# EAGLE board Numitron3 (EAGLE 9.3.2)
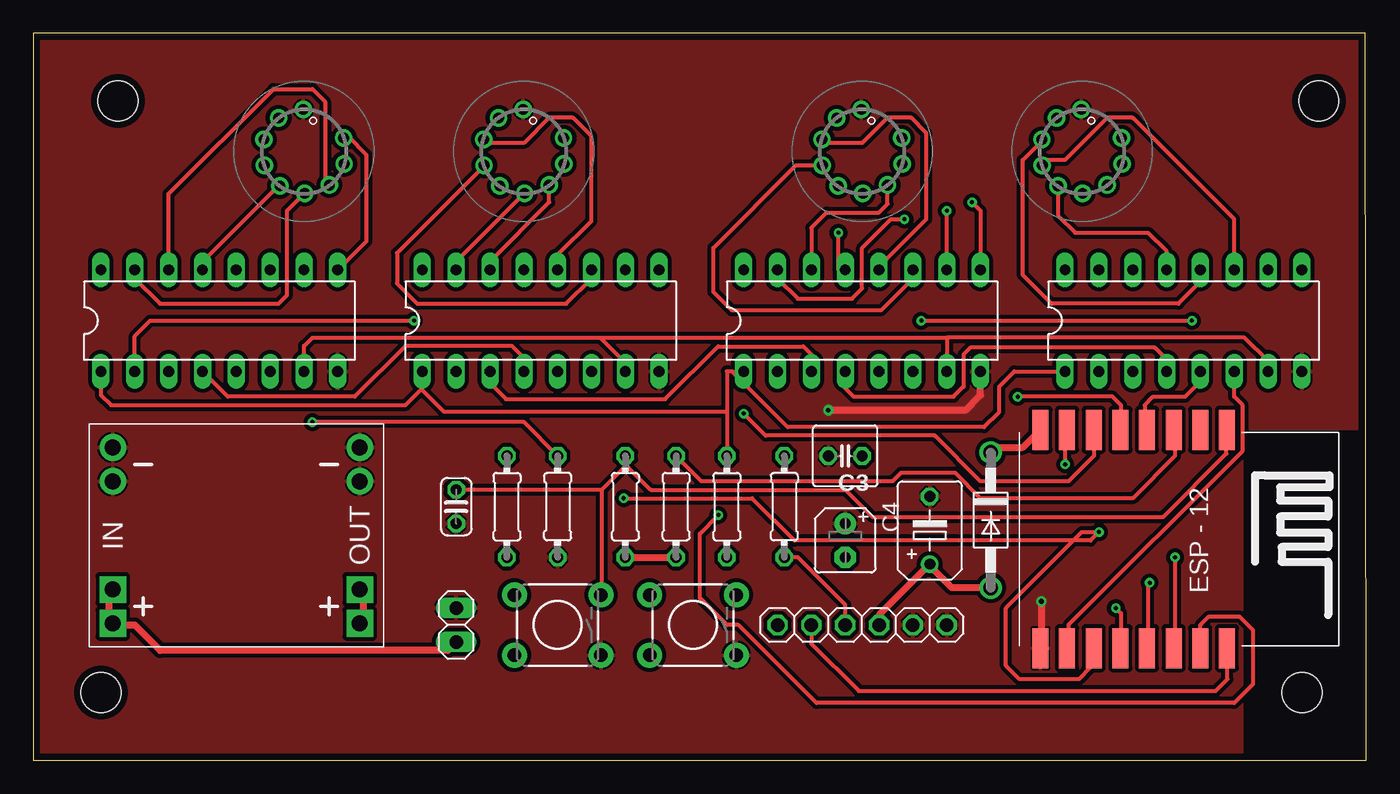
[diagram p0: board, top side]
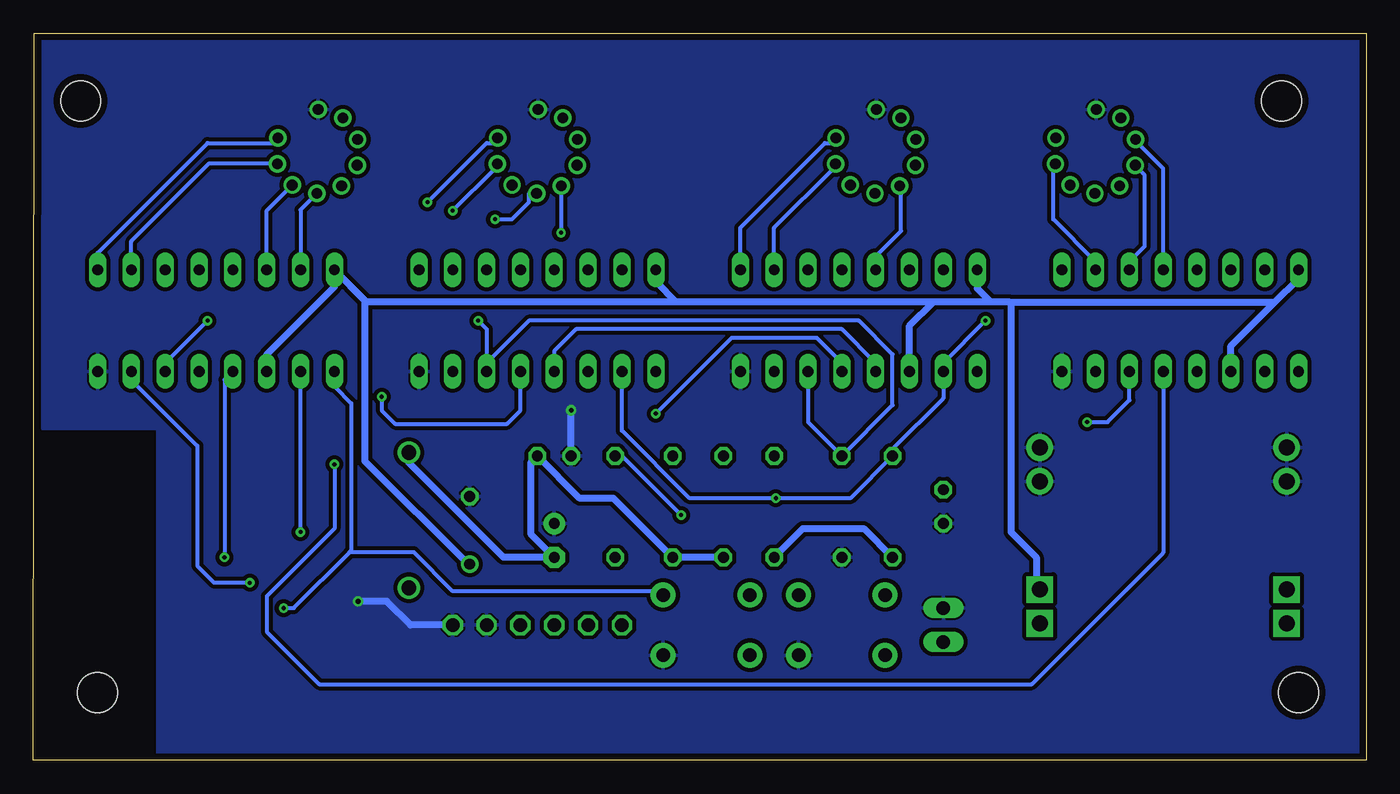
[diagram p1: board, bottom side, seen from below]

Size 100.08 x 54.6 mm. Coordinates in mm from the lower left corner, seen from the top.
Outline: 0,0 100.08,0 100,54.6 0,54.6 0,0
Copper layers (1*16): Top 0.035mm / dielectric 1.5mm / Bottom 0.035mm
Design rules "NYAKARUHAZ_StandardNYAK *": minimum track width 12mil, minimum drill 12mil, track to track 12mil, track to pad 12mil, pad to pad 10mil, via to via 10mil, smd to smd 6mil, copper to edge 20mil, drill to drill 8mil, minimum pad ring 10mil, minimum via ring 8mil, stop-mask expansion 4mil, vias tented up to drill 0mil, thermal gap 6mil
Net classes: 1 power: width 0.508 mm, clearance 0.305 mm
Holes 3 mm at 6.35,49.53 96.52,49.53 95.25,5.08 5.08,5.08

## Footprints (pad centres in the part's own frame; a part is rotated, then mirrored left to right if it is on the bottom)
C025-024X044 = drill 0.813 octagon: 1 -1.27,0; 2 1.27,0
B45181B = drill 0.813: + -2.54,0 | drill 0.813 octagon: - 2.54,0
C025-050X050 = drill 0.813 octagon: 1 -1.27,0; 2 1.27,0
B45181A = drill 0.813 pad 1.6: + -1.27,0 | drill 0.813 pad 1.6 octagon: - 1.27,0
DO41-10 = drill 1.118: A 5.08,0; C -5.08,0
ESP12-SMD = smd 3 x 1.2: ADC -8.3,3.8; CH_PD -8.3,1.8; GND 8.1,-8.2; GPIO0 8.1,-2.2; GPIO2 8.1,-4.2; GPIO4 8.1,1.8; GPIO5 8.1,-0.2; GPIO12 -8.3,-4.2; GPIO13 -8.3,-6.2; GPIO14 -8.3,-2.2; GPIO15 8.1,-6.2; GPIO16 -8.3,-0.2; RESET -8.3,5.8; RXD0 8.1,3.8; TXD0 8.1,5.8; VCC -8.3,-8.2
1X06 = drill 1.016 octagon: 1 -6.35,0; 2 -3.81,0; 3 -1.27,0; 4 1.27,0; 5 3.81,0; 6 6.35,0
DIL16 = drill 0.813 long: 1 -8.89,-3.81; 2 -6.35,-3.81; 3 -3.81,-3.81; 4 -1.27,-3.81; 5 1.27,-3.81; 6 3.81,-3.81; 7 6.35,-3.81; 8 8.89,-3.81; 9 8.89,3.81; 10 6.35,3.81; 11 3.81,3.81; 12 1.27,3.81; 13 -1.27,3.81; 14 -3.81,3.81; 15 -6.35,3.81; 16 -8.89,3.81
1X02 = drill 1.016 long: 1 -1.27,0; 2 1.27,0
TACTILE_SWITCH_PTH_6.0MM = drill 1.016 pad 1.88: 1 -3.251,2.261; 2 3.251,2.261; 3 -3.251,-2.261; 4 3.251,-2.261
0204/7 = drill 0.813 octagon: 1 -3.81,0; 2 3.81,0
IV-9 = drill 0.8: 1 1.854,-2.552; 2 3,-0.975; 3 3,0.975; 4 1.854,2.552; 5 0,3.154; 6 -1.854,2.552; 7 -3,0.975; 8 -3,-0.975; 9 -1.854,-2.552
DC-DC-STEP-DOWN-MP1584 = drill 1.2 pad 2 square: IN+.1 -9.271,-4.064; IN+.2 -9.271,-6.604; OUT+.1 9.271,-4.064; OUT+.2 9.271,-6.604 | drill 1.2 pad 2: IN-.1 -9.271,6.604; IN-.2 -9.271,4.064; OUT-.1 9.271,6.604; OUT-.2 9.271,4.064

## Placement (x,y rotation side)
C1  100n  [C025-024X044]  31.75,19.05 270 top
C2  470u  [B45181B]  67.31,17.27 90 top
C3  100n  [C025-050X050]  60.96,22.86 180 top
C4  10u  [B45181A]  60.96,16.51 270 top
D1  1N4004  [DO41-10]  71.88,18.03 270 top
ESP-07  [ESP12-SMD]  83.82,16.51 270 top
FTDI  [1X06]  62.23,10.16 180 top
IC1  4511N  [DIL16]  13.97,33.02 0 top
IC2  4511N  [DIL16]  38.1,33.02 0 top
IC3  4511N  [DIL16]  62.23,33.02 0 top
IC4  4511N  [DIL16]  86.36,33.02 0 top
JP3  [1X02]  31.75,10.16 270 top
PROG  MOMENTARY-SWITCH-SPST-PTH-6.0MM  [TACTILE_SWITCH_PTH_6.0MM]  49.53,10.16 180 top
R1  10k  [0204/7]  44.45,19.05 270 top
R2  10k  [0204/7]  48.26,19.05 270 top
R4  1k  [0204/7]  56.39,19.05 90 top
R5  10k  [0204/7]  52.07,19.05 270 top
R6  10k  [0204/7]  39.37,19.05 90 top
R7  10k  [0204/7]  35.56,19.05 270 top
RESET  MOMENTARY-SWITCH-SPST-PTH-6.0MM  [TACTILE_SWITCH_PTH_6.0MM]  39.37,10.16 180 top
U$2  IV-9  [IV-9]  20.32,45.72 145 top
U$3  IV-9  [IV-9]  36.83,45.72 145 top
U$4  IV-9  [IV-9]  62.23,45.72 145 top
U$5  IV-9  [IV-9]  78.74,45.72 145 top
U$6  DC-DC-STEP-DOWN-MP1584  [DC-DC-STEP-DOWN-MP1584]  15.24,16.89 0 top

## Library data of the parts
C1-C4 = rcl; SPICEPREFIX: C
D1 = diode
ESP-07 = esp8266modules
FTDI = adafruit
IC1-IC4 = 45xx
JP3 = pinhead
PROG RESET = SparkFun-Switches; PROD_ID: SWCH-08441; SF_SKU: COM-00097
R1 R2 R4-R7 = rcl; SPICEPREFIX: R
U$2-U$5 = domestichacks
U$6 = diy-modules

## Nets
BI: ESP-07.GPIO4 IC1.4 IC2.4 IC3.4 IC4.4
GND [power]: C1.2 C2.- C3.2 C4.+ ESP-07.GND FTDI.1 FTDI.2 IC1.8 IC2.8 IC3.8 IC4.8 JP3.1 PROG.1 R6.1 RESET.1 U$2.1 U$3.1 U$4.1 U$5.1 U$6.IN-.1 U$6.IN-.2 U$6.OUT-.1 U$6.OUT-.2
LE1: ESP-07.GPIO13 IC1.5
LE2: ESP-07.GPIO12 IC2.5
LE3: ESP-07.GPIO14 IC3.5
LE4: ESP-07.GPIO16 IC4.5
N$1: ESP-07.GPIO5 IC1.7 IC2.7 IC3.7 IC4.7
N$2: ESP-07.GPIO0 IC1.1 IC2.1 IC3.1 IC4.1 PROG.3 R5.1
N$3: ESP-07.GPIO2 IC1.2 IC2.2 IC3.2 IC4.2 R7.1
N$4: ESP-07.GPIO15 IC1.6 IC2.6 IC3.6 IC4.6 R6.2
N$5: IC1.13 U$2.5
N$6: IC1.12 U$2.3
N$7: IC1.11 U$2.4
N$8: IC1.10 U$2.8
N$9: IC1.9 U$2.9
N$10: IC1.15 U$2.6
N$11: IC1.14 U$2.7
N$12: IC2.14 U$3.7
N$13: IC2.12 U$3.3
N$14: IC2.13 U$3.5
N$15: IC2.10 U$3.8
N$16: IC2.9 U$3.9
N$17: IC2.11 U$3.4
N$18: IC2.15 U$3.6
N$19: IC3.9 U$4.9
N$20: IC3.13 U$4.5
N$21: IC3.12 U$4.3
N$22: IC3.15 U$4.6
N$23: IC3.14 U$4.7
N$24: IC3.10 U$4.8
N$25: IC3.11 U$4.4
N$26: IC4.14 U$5.7
N$27: IC4.15 U$5.6
N$28: IC4.9 U$5.9
N$29: IC4.10 U$5.8
N$30: IC4.11 U$5.4
N$31: IC4.12 U$5.3
N$32: IC4.13 U$5.5
N$33: ESP-07.CH_PD R2.1
N$37 [power]: JP3.2 U$6.IN+.1 U$6.IN+.2
N$39: FTDI.4 R4.1
RESET: C1.1 ESP-07.RESET R1.1 RESET.3
RX: ESP-07.RXD0 R4.2
TX: ESP-07.TXD0 FTDI.5
VCC [power]: C2.+ D1.A FTDI.3 IC1.3 IC1.16 IC2.3 IC2.16 IC3.3 IC3.16 IC4.3 IC4.16 U$6.OUT+.1 U$6.OUT+.2
VCC_ESP [power]: C3.1 C4.- D1.C ESP-07.VCC R1.2 R2.2 R5.2 R7.2

## Tracks (layer width: path | path; a pad name or v marks a point on that pad's centre or on a via)
BI  (via drill 0.3)
  Top 0.305: v85.72,15.24 85.72,8.89 ESP-07.GPIO4 | IC1.4 14.61,27.3 24.13,27.3 27.94,31.11 35.94,31.11 36.83,30.23 IC2.4 | IC4.4 85.09,30.1 84.2,30.99 70.36,30.99 69.85,30.48 69.85,28.07 69.09,27.3 61.59,27.3 60.96,27.94 IC3.4
  Bottom 0.305: v85.72,15.24 85.72,28.57 IC4.4 | IC2.4 36.83,29.84 39.37,32.38 59.31,32.38 60.96,30.73 IC3.4
GND  (via drill 0.35)
  Top 0.508: v75.69,11.94 75.69,9.65 | IC3.8 71.12,27.43 69.98,26.29 v59.69,26.29
  Bottom 0.508: v75.69,11.94 73.53,11.94 71.75,10.16 FTDI.1 | C3.2 v59.69,26.29
  pour Top (isolate 0.254): 0,54.36 0,0 90.81,0 90.81,24.89 99.44,24.89 99.44,54.36
  pour Bottom (isolate 0.254): 0,54.36 99.44,54.36 99.44,24.89 90.81,24.89 90.81,0 0,0
LE1  (via drill 0.3)
  Top 0.305: v77.47,22.23 77.47,24.77 ESP-07.GPIO13
  Bottom 0.305: IC1.5 15.24,15.59 25.11,5.71 78.61,5.71 82.55,9.65 82.55,12.32 77.47,17.4 v77.47,22.23
LE2  (via drill 0.3)
  Top 0.305: v53.34,26.04 54.99,24.38 67.69,24.38 71.12,20.95 77.72,20.95 79.63,22.86 ESP-07.GPIO12
  Bottom 0.305: IC2.5 39.37,29.84 41.27,31.75 47.62,31.75 v53.34,26.04
LE3  (via drill 0.3)
  Top 0.305: v73.91,27.3 81.03,27.3 81.66,26.67 81.66,24.85 ESP-07.GPIO14
  Bottom 0.305: IC3.5 63.5,26.29 64.52,25.27 72.9,25.27 73.91,26.29 v73.91,27.3
LE4
  Top 0.305: IC4.5 87.63,28.45 86.49,27.3 84.07,27.3 83.44,26.67 83.44,24.99 ESP-07.GPIO16
N$1  (via drill 0.3)
  Top 0.305: 42.55,31.75 44.45,29.84 IC2.7 | 68.58,31.75 IC3.7 | 42.55,31.75 68.58,31.75 | 68.58,31.75 90.93,31.75 92.71,29.97 IC4.7 | v83.82,13.34 83.69,13.21 83.69,8.59 ESP-07.GPIO5 | IC1.7 20.32,31.11 20.95,31.75 42.55,31.75
  Bottom 0.305: v83.82,13.34 86.49,13.34 87.76,14.61 87.76,23.62 92.71,28.57 IC4.7
N$2  (via drill 0.3)
  Top 0.305: 52.07,26.16 52.07,29.21 52.45,29.21 | 52.07,26.16 R5.1 | 52.45,29.21 56.64,25.02 71.37,25.02 72.52,26.16 72.52,28.07 73.66,29.21 IC4.1 | 52.45,29.21 IC3.1 | v81.28,11.43 81.66,11.05 81.66,8.45 ESP-07.GPIO0 | 52.07,26.16 30.86,26.16 29.21,27.81 IC2.1 29.21,27.94 27.94,26.67 5.84,26.67 5.08,27.43 IC1.1
  Bottom 0.305: v81.28,11.43 80.52,11.43 76.33,15.62 | 76.33,15.62 76.2,15.75 76.2,26.8 77.47,28.07 IC4.1 | PROG.3 53.34,12.7 68.58,12.7 71.5,15.62 76.33,15.62
N$3  (via drill 0.3)
  Top 0.305: ESP-07.GPIO2 79.38,8.26 79.38,6.99 78.49,6.1 74.04,6.1 73.03,7.11 73.03,11.43 78.74,17.14 v80.01,17.14 79.38,16.51 57.15,16.51 53.98,19.68 v44.32,19.68 | IC1.2 7.62,31.88 8.76,33.02 v28.57,33.02
  Bottom 0.305: v80.01,17.14 IC4.2 | v28.57,33.02 31.75,29.84 IC2.2 31.75,27.18 35.56,23.37 R7.1 38.73,19.68 v44.32,19.68 50.8,19.68 55.88,24.77 IC3.2
N$4  (via drill 0.3)
  Top 0.305: IC4.6 90.17,27.3 90.81,26.67 90.81,23.24 77.72,10.16 77.72,8.51 ESP-07.GPIO15 | v20.95,25.4 36.83,25.4 R6.2 | v66.67,33.02 v87,33.02
  Bottom 0.305: IC2.6 41.91,25.4 R6.2 35.56,26.67 35.56,30.48 38.1,33.02 62.87,33.02 66.04,29.84 | IC1.6 17.78,27.05 19.43,25.4 v20.95,25.4 | 66.04,29.84 IC3.6 | IC4.6 90.17,29.84 v87,33.02 | v66.67,33.02 66.04,32.38 66.04,29.84
N$5
  Top 0.305: IC1.13 12.7,37.47 18.37,43.14 U$2.5
N$6
  Bottom 0.305: IC1.12 15.24,44.45 17.14,46.35 U$2.3
N$7
  Bottom 0.305: IC1.11 17.78,37.47 16.64,38.61 16.64,43.94 17.14,44.45 U$2.4
N$8
  Bottom 0.305: IC1.10 20.32,37.47 23.5,40.64 23.5,44.45 U$2.8
N$9
  Top 0.305: U$2.9 23.74,46.75 25.02,45.47 25.02,38.99 IC1.9
N$10
  Top 0.305: IC1.15 7.62,36.2 9.53,34.29 18.41,34.29 19.05,34.92 19.05,41.27 20.32,42.55 U$2.6
N$11
  Top 0.305: U$2.7 22.2,43.2 21.91,43.5 21.91,49.47 20.95,50.42 18.03,50.42 10.16,42.55 IC1.14
N$12
  Top 0.305: IC2.14 34.29,37.47 38.73,41.9 U$3.7
N$13
  Top 0.305: IC2.12 39.37,37.97 41.91,40.51 41.91,46.86 40.51,48.26 38.73,48.26 36.83,46.35 34.29,46.35 U$3.3
N$14
  Bottom 0.305: IC2.13 36.83,37.85 34.92,39.75 34.92,42.55 U$3.5
N$15
  Bottom 0.305: IC2.10 44.45,40.01 40.01,44.45 U$3.8
N$16
  Bottom 0.305: IC2.9 46.99,40.01 40.64,46.35 40.01,46.35 U$3.9
N$17
  Top 0.305: IC2.11 41.91,36.2 40.01,34.29 28.83,34.29 27.3,35.81 27.3,38.1 33.66,44.45 U$3.4
N$18
  Top 0.305: IC2.15 31.75,37.47 36.83,42.55 U$3.6
N$19  (via drill 0.3)
  Top 0.305: v70.48,41.91 71.12,41.27 IC3.9
  Bottom 0.305: v70.48,41.91 66.04,46.35 65.41,46.35 U$4.9
N$20  (via drill 0.3)
  Top 0.305: v60.45,39.62 60.45,36.83 IC3.13
  Bottom 0.305: U$4.5 60.45,43.1 v60.45,39.62
N$21
  Top 0.305: IC3.12 63.5,37.08 67.06,40.64 67.06,47.12 65.91,48.26 64.14,48.26 62.23,46.35 59.69,46.35 U$4.3
N$22  (via drill 0.3)
  Top 0.305: v65.41,40.64 64.39,40.64 62.23,38.48 62.23,35.43 61.47,34.67 57.4,34.67 55.88,36.2 IC3.15
  Bottom 0.305: v65.41,40.64 64.14,40.64 62.87,41.91 62.87,42.55 U$4.6
N$23
  Top 0.305: U$4.7 64.14,43.18 64.14,41.78 63.5,41.15 59.56,41.15 58.42,40.01 IC3.14
N$24  (via drill 0.3)
  Top 0.305: IC3.10 v68.58,41.27
  Bottom 0.305: v68.58,41.27 65.41,44.45 U$4.8
N$25
  Top 0.305: U$4.4 57.27,44.69 51.05,38.48 51.05,35.18 52.45,33.78 63.63,33.78 66.04,36.2 IC3.11
N$26
  Bottom 0.305: IC4.14 82.55,41.29 U$5.7
N$27
  Bottom 0.305: U$5.6 80.01,41.35 IC4.15
N$28
  Bottom 0.305: IC4.9 95.25,38.1 87,46.35 81.92,46.35 U$5.9
N$29
  Bottom 0.305: U$5.8 81.79,44.83 86.87,44.83 92.71,38.99 IC4.10
N$30
  Top 0.305: IC4.11 90.17,40.64 82.55,48.26 80.64,48.26 77.47,45.09 76.2,45.09 U$5.4
N$31
  Top 0.305: IC4.12 87.63,35.94 85.98,34.29 76.45,34.29 74.3,36.45 74.3,45.09 75.56,46.35 U$5.3
N$32
  Top 0.305: IC4.13 85.09,38.23 83.69,39.62 78.23,39.62 76.93,40.92 U$5.5
N$33
  Top 0.305: R2.1 50.16,20.95 64.52,20.95 65.15,21.59 69.22,21.59 71.12,19.68 82.55,19.68 85.72,22.86 85.72,24.77 ESP-07.CH_PD
N$37
  Top 0.508: JP3.2 31.11,8.26 9.53,8.26 7.62,10.16 6.35,10.16 U$6.IN+.2 5.71,10.79 5.71,12.7 U$6.IN+.1
N$39
  Top 0.305: FTDI.4 60.96,11.68 57.4,15.24 R4.1
RESET
  Top 0.305: 42.67,20.32 C1.1 | 44.45,22.1 44.51,22.16 46.35,20.32 60.96,20.32 62.99,18.29 84.84,18.29 89.58,23.03 89.58,24.79 ESP-07.RESET | 42.67,20.32 44.32,21.97 44.45,22.1 | 42.67,20.32 42.67,12.47 RESET.3 | R1.1 44.45,22.1
RX  (via drill 0.3)
  Top 0.305: v51.44,18.41 50.04,17.02 50.04,12.19 52.07,10.16 52.96,10.16 58.8,4.32 90.17,4.32 91.57,5.71 91.57,9.78 90.55,10.79 88.27,10.79 87.63,10.16 87.63,8.89 ESP-07.RXD0
  Bottom 0.305: v51.44,18.41 55.88,22.86 R4.2
TX
  Top 0.305: FTDI.5 58.42,8.76 61.98,5.21 88.77,5.21 89.66,6.1 89.66,8.37 ESP-07.TXD0
VCC
  Top 0.305: IC2.3 34.29,28.32 35.48,27.13 47.45,27.13 51.41,31.09 57.81,31.09 58.42,30.48 IC3.3
  Top 0.508: D1.A 68.96,12.95 67.31,14.61 C2.+ 63.5,10.92 FTDI.3 | U$6.OUT+.2 24.77,10.79 24.77,12.7 U$6.OUT+.1
  Bottom 0.508: IC1.16 5.08,36.2 6.86,34.42 | 26.8,34.42 6.86,34.42 | IC2.16 29.21,35.43 28.19,34.42 | 26.8,34.42 26.67,34.29 26.67,17.14 24.77,15.24 24.77,13.34 U$6.OUT+.1 | IC3.16 53.34,35.94 51.82,34.42 | 26.8,34.42 28.19,34.42 | 28.19,34.42 32.51,34.42 | 32.51,34.42 51.82,34.42 | IC4.16 75.06,34.42 51.82,34.42 | C2.+ 67.44,14.73 75.18,22.48 75.18,34.54 IC4.16 | IC2.3 34.29,32.64 32.51,34.42 | IC4.3 82.55,30.48 77.47,35.56 IC4.16 | IC1.3 10.16,31.11 6.86,34.42
VCC_ESP
  Top 0.508: R1.2 R2.2 | ESP-07.VCC 75.56,24.77 74.3,23.5 72.39,23.5 D1.C
  Bottom 0.508: R7.2 37.72,17.4 42.29,17.4 R1.2 | R2.2 R5.2 56.52,19.68 59.05,19.68 C3.1 62.74,22.35 62.74,17.02 C4.- 64.77,15.24 71.88,22.35 D1.C

## Text on the board
tDocu: - | TX | RX | VCC | GND | + | IV-9 NUMITRON CLOCK v3 GP 2019